# Altium PCB Amber_Main_Board.PcbDoc (part 4 of 6)
Units mm, origin at the board's own origin, x right, y up, seen from the top; angles counter-clockwise.
Board outline 90 x 23 mm, 4 copper layers (Top Layer, Power, Ground, Bottom Layer), stack 1.142 mm thick; 237 components, 104 nets, 614 pads, 347 vias.
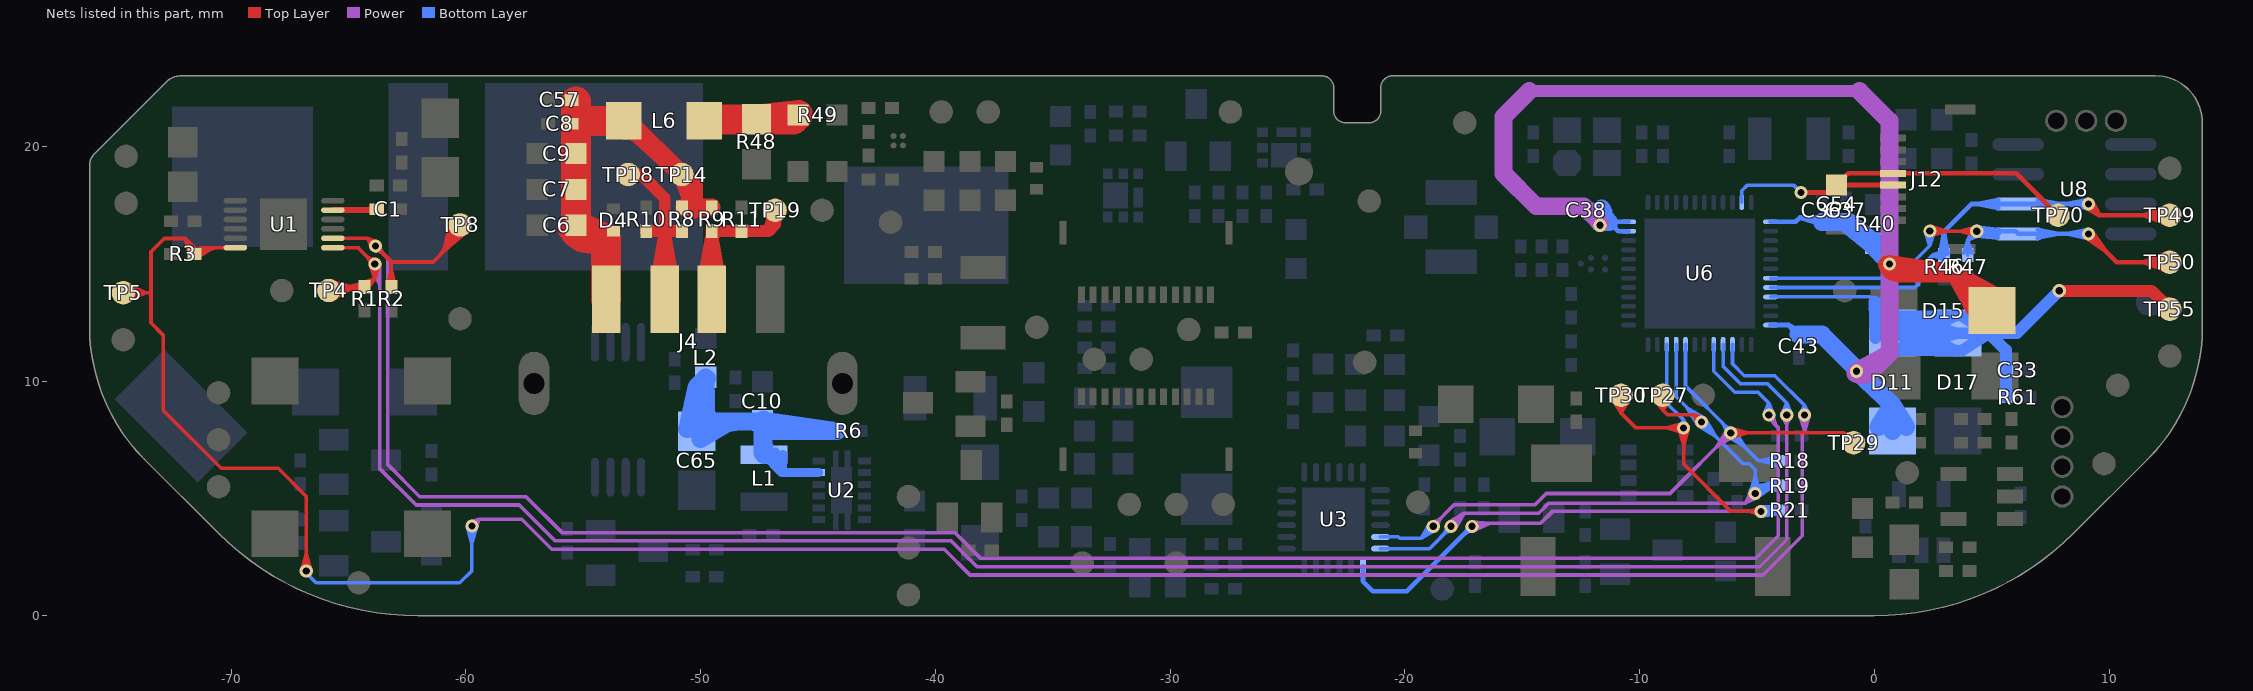
[diagram p6: the nets of this part, all layers, seen from the top]

## Via types
v1: diameter 0.559, hole 0.305, Top Layer to Bottom Layer, tented both sides, 306 vias
v2: diameter 0.66, hole 0.33, Top Layer to Bottom Layer, tented both sides, 16 vias
v3: diameter 0.762, hole 0.508, Top Layer to Bottom Layer, tented both sides, 12 vias
v4: diameter 0.6, hole 0.3, Top Layer to Bottom Layer, tented both sides, 9 vias
v5: diameter 0.5, hole 0.3, Top Layer to Bottom Layer, 3 vias
v6: diameter 0.762, hole 0.559, Top Layer to Bottom Layer, tented both sides, 1 vias

## Nets (pads, with @x,y where several pads share a name; then routed paths per layer and width w, separated by ;. In a path a pad name is that pad's centre, name@x,y a point inside that pad or via, vN(x,y) a via of type N, cw(c..) or ccw(c..) an arc to the next point about the centre after c; other vN are vias at no path point) (continued)
GPOUT: R3.1 TP5.1 U1.12 U6.15 | length 160.6
  Top Layer w0.152: TP5.1@-74.599,13.642 -73.845,13.726 ; TP5.1@-74.599,13.88 -73.845,13.796 ; TP5.1@-74.596,13.642 -73.646,13.761 ; TP5.1@-74.596,13.879 -73.646,13.761 ; TP5.1@-74.588,13.643 -73.845,13.796 ; TP5.1@-74.588,13.879 -73.845,13.726 ; TP5.1@-74.567,13.492 -73.845,13.726 ; TP5.1@-74.567,14.03 -73.845,13.796 ; TP5.1@-74.565,13.492 -73.646,13.761 ; TP5.1@-74.565,14.029 -73.646,13.761 ; TP5.1@-74.542,13.496 -73.845,13.796 ; TP5.1@-74.542,14.025 -73.845,13.726 ; TP5.1@-74.509,13.347 -73.646,13.761 ; TP5.1@-74.509,14.174 -73.646,13.761 ; TP5.1@-74.504,13.349 -73.845,13.726 ; TP5.1@-74.504,14.173 -73.845,13.796 ; TP5.1@-74.466,13.36 -73.845,13.796 ; TP5.1@-74.466,14.162 -73.845,13.726 ; TP5.1@-74.411,13.569 cw(c-73.948,13.106) -73.948,13.761 cw(c-73.948,14.416) TP5.1@-74.411,13.953 ; TP5.1@-74.303,13.461 cw(c-73.58,12.738) -73.58,13.761 cw(c-73.58,14.784) TP5.1@-74.303,14.06 ; -73.461,13.761 TP5.1@-74.603,13.761 ; R3.1@-71.783,15.45 -71.643,15.673 ; R3.1@-71.782,15.45 ccw(c-72.434,15.599) -71.961,16.072 ; R3.1@-71.782,15.371 -71.795,15.796 ; R3.1@-71.775,15.349 -71.961,16.072 ; -71.767,15.877 cw(c-72.117,15.527) R3.1@-71.634,15.416 ; R3.1@-71.631,15.572 ccw(c-71.674,15.674) -71.563,15.674 ; R3.1@-71.606,15.504 cw(c-71.177,15.076) -71.177,15.682 ; -71.572,15.682 cw(c-71.8,15.454) R3.1@-71.485,15.383 ; R3.1@-71.566,15.577 -71.062,15.649 ; R3.1@-71.552,15.581 -70.732,15.682 ; R3.1@-71.543,15.583 -70.856,15.616 ; R3.1@-71.513,15.586 ccw(c-71.513,15.884) -71.302,15.673 ; R3.1@-71.498,15.397 cw(c-70.81,14.708) -70.81,15.682 ; R3.1@-71.495,15.572 cw(c-71.452,15.674) -71.563,15.674 ; R3.1@-71.475,15.517 -71.795,15.796 ; R3.1@-71.47,15.51 -71.961,16.072 ; R3.1@-71.457,15.488 -71.643,15.673 ; R3.1@-71.441,15.254 -70.856,15.616 ; R3.1@-71.439,15.254 -70.732,15.682 ; R3.1@-71.407,15.274 -71.062,15.649 ; R3.1@-71.39,15.289 cw(c-70.442,14.34) -70.442,15.682 ; R3.1@-71.347,15.463 cw(c-71.139,15.528) -71.293,15.682 ; -70.777,15.682 U1.12@-70.2,15.682 ; U1.12@-69.82,15.682 -71.293,15.682 ; v1@-67.003,1.933 -66.802,2.642 v1@-66.601,1.933 ; v1@-67,1.953 -66.819,2.269 ; v1@-66.994,1.971 -66.785,2.269 ; v1@-66.946,2.049 ccw(c-67.293,2.396) -66.802,2.396 ccw(c-66.311,2.396) v1@-66.658,2.049 ; v1@-66.61,1.971 -66.819,2.269 ; v1@-66.604,1.953 -66.785,2.269 ; TP5.1@-74.603,13.761 -73.845,13.726 ; TP5.1@-74.603,13.761 -73.845,13.796 ; -71.961,16.072 R3.1@-71.613,15.412 ; -71.961,16.072 -72.848,16.072 -73.416,15.504 -73.416,12.475 -72.901,11.96 -72.901,8.76 -70.421,6.279 -68.001,6.279 -66.802,5.08 v1(-66.802,1.905) ; -71.961,16.072 -71.563,15.674 ; -71.795,15.796 R3.1@-71.613,15.412 ; -71.643,15.673 R3.1@-71.613,15.412 ; R3.1@-71.563,15.412 -71.563,15.674 ; R3.1@-71.563,15.412 -71.563,15.674 ; R3.1@-71.563,15.412 -71.293,15.682 ; -71.563,15.674 -71.727,15.469 -71.563,15.674 ; -71.563,15.674 -71.399,15.469 -71.563,15.674 ; R3.1@-71.513,15.412 -71.293,15.682 ; R3.1@-71.513,15.412 -70.856,15.616 ; R3.1@-71.513,15.412 -71.062,15.649 ; R3.1@-71.513,15.412 -70.732,15.682 ; R3.1@-71.513,15.412 -71.293,15.682 ; -71.293,15.682 -71.616,15.552 -71.293,15.682 ; -71.293,15.682 -71.355,15.339 -71.293,15.682 ; -66.819,2.269 v1(-66.802,1.905) ; v1(-66.802,1.905) -66.785,2.269
  Power w0.152: v1@-59.715,4.024 ccw(c-59.671,4.321) -59.458,4.109 ; v1@-59.543,3.852 cw(c-59.245,3.896) -59.458,4.109 ; v1@-3.176,8.523 -2.975,7.874 ; v1@-3.173,8.506 -2.992,8.19 ; v1@-3.167,8.488 -2.958,8.19 ; v1@-3.119,8.41 cw(c-3.466,8.063) -2.975,8.063 cw(c-2.484,8.063) v1@-2.831,8.41 ; v1@-2.783,8.488 -2.992,8.19 ; v1@-2.778,8.506 -2.958,8.19 ; v1@-2.774,8.523 -2.975,7.874 ; v1@-59.847,3.998 -59.458,4.109 ; v1@-59.847,3.998 -59.458,4.109 ; v1@-59.847,3.998 -59.458,4.109 ; v1(-59.744,3.823) -59.458,4.109 ; v1(-59.744,3.823) -59.458,4.109 ; v1(-59.744,3.823) -59.458,4.109 ; v1@-59.569,3.72 -59.458,4.109 ; v1@-59.569,3.72 -59.458,4.109 ; v1@-59.569,3.72 -59.458,4.109 ; -59.458,4.109 -57.617,4.109 -56.34,2.832 -39.624,2.832 -38.527,1.736 -4.741,1.736 -3.073,3.404 -3.073,7.776 -2.975,7.874 ; -2.992,8.19 v1(-2.975,8.554) ; -2.975,7.874 v1(-2.975,8.554) ; -2.975,7.874 v1(-2.975,8.554) ; v1(-2.975,8.554) -2.958,8.19
  Bottom Layer w0.152: v1(-66.802,1.905) -66.802,1.821 -66.384,1.404 -60.258,1.404 -59.744,1.918 v1(-59.744,3.823) ; v1@-59.945,3.795 -59.744,3.086 v1@-59.543,3.795 ; v1@-59.942,3.775 -59.761,3.459 ; v1@-59.936,3.757 -59.727,3.459 ; v1@-59.888,3.679 cw(c-60.235,3.332) -59.744,3.332 cw(c-59.253,3.332) v1@-59.6,3.679 ; v1@-59.552,3.757 -59.761,3.459 ; v1@-59.547,3.775 -59.727,3.459 ; -6.047,10.776 U6.15@-6.047,11.333 ; U6.15@-6.047,11.558 -6.047,10.732 -5.546,10.23 -4.245,10.23 -2.975,8.96 ; v1@-3.172,8.605 -2.975,8.96 ; v1@-3.171,8.609 -3,8.84 ; v1@-3.158,8.641 -2.951,8.84 ; v1@-3.097,8.716 ccw(c-3.28,8.96) -2.975,8.96 ; v1@-2.853,8.716 cw(c-2.67,8.96) -2.975,8.96 ; v1@-2.792,8.641 -3,8.84 ; v1@-2.78,8.609 -2.951,8.84 ; v1@-2.778,8.605 -2.975,8.96 ; -59.761,3.459 v1(-59.744,3.823) ; v1(-59.744,3.823) -59.727,3.459 ; -3,8.84 v1(-2.975,8.554) ; v1(-2.975,8.554) -2.951,8.84 ; v1(-2.975,8.554) -2.975,8.96
HALL_OUT: C54.1 J12.4 J12.5 TP70.1 U6.47 | length 17.7
  Top Layer w0.203: v1(-3.132,18.029) -1.926,18.029 C54.1@-1.608,18.346 C54.1@-1.606,18.348 ; J12.4@0.795,18.348 C54.1@-1.606,18.348 ; TP70.1@7.82,17.063 6.035,18.848 J12.5@0.795,18.848 -1.106,18.848 C54.1@-1.606,18.348
  Bottom Layer w0.152: U6.47@-5.647,17.608 -5.647,18.104 -5.405,18.346 -3.449,18.346 v1(-3.132,18.029)
I2C_A_SCL_T_E: R46.1 TP49.1 U6.8 U8.6 | length 58.3
  Top Layer w0.203: v1@9.004,17.398 9.588,17.063 ; v1@9.112,17.361 cw(c9.112,16.932) 9.416,17.235 cw(c9.719,17.539) v1@9.29,17.539 ; v1(9.112,17.539) 9.588,17.063 ; v1@9.253,17.647 9.588,17.063 ; TP49.1@12.302,16.781 ccw(c11.622,16.101) 11.622,17.063 ccw(c11.622,18.025) TP49.1@12.302,17.344 ; TP49.1@12.455,16.686 11.871,17.096 ; TP49.1@12.455,17.44 11.871,17.03 ; TP49.1@12.49,16.675 11.871,17.03 ; TP49.1@12.49,17.45 11.871,17.096 ; TP49.1@12.512,16.671 11.474,17.063 ; TP49.1@12.512,17.455 11.474,17.063 ; TP49.1@12.548,16.871 11.871,17.096 ; TP49.1@12.548,17.255 11.871,17.03 ; 9.588,17.063 TP49.1@12.584,17.063 ; 11.474,17.063 12.567,16.868 11.871,17.03 ; 11.474,17.063 12.567,17.257 11.871,17.096 ; 11.871,17.03 TP49.1@12.584,17.063 ; 11.871,17.096 TP49.1@12.584,17.063
  Bottom Layer w0.152: U6.8@-4.422,13.983 1.724,13.983 1.851,14.11 ; U6.8@-4.197,13.983 -3.64,13.983
  Bottom Layer w0.203: 1.851,14.11 1.851,14.714 2.499,15.362 ; R46.1@2.816,15.425 2.964,16.271 ; R46.1@2.82,15.447 2.952,15.677 ; R46.1@2.823,15.46 2.976,15.677 ; R46.1@2.859,15.257 ccw(c2.606,15.003) 2.606,15.362 ccw(c2.606,15.72) R46.1@2.859,15.467 ; R46.1@2.859,15.517 ccw(c2.606,15.77) 2.964,15.77 ccw(c3.322,15.77) R46.1@3.069,15.517 ; R46.1@2.916,15.221 2.698,15.374 ; R46.1@2.916,15.502 2.698,15.35 ; R46.1@2.929,15.217 2.698,15.35 ; R46.1@2.929,15.506 2.698,15.374 ; R46.1@2.94,15.215 2.499,15.362 ; R46.1@2.94,15.508 2.499,15.362 ; R46.1@3.104,15.46 2.952,15.677 ; R46.1@3.108,15.447 2.976,15.677 ; R46.1@3.112,15.425 2.964,16.271 ; U8.6@5.172,17.416 ccw(c4.876,17.12) 4.876,17.539 ccw(c4.876,17.957) U8.6@5.172,17.661 ; U8.6@5.239,17.375 4.985,17.553 ; U8.6@5.239,17.703 4.985,17.524 ; U8.6@5.254,17.37 4.985,17.524 ; U8.6@5.254,17.707 4.985,17.553 ; U8.6@5.278,17.366 4.41,17.539 ; U8.6@5.278,17.711 4.41,17.539 ; U8.6@6.962,17.366 7.83,17.539 ; U8.6@6.962,17.711 7.83,17.539 ; U8.6@6.986,17.37 7.255,17.524 ; U8.6@6.986,17.707 7.255,17.553 ; U8.6@7.001,17.375 7.255,17.553 ; U8.6@7.001,17.703 7.255,17.524 ; U8.6@7.068,17.416 cw(c7.364,17.12) 7.364,17.539 cw(c7.364,17.957) U8.6@7.068,17.661 ; v1@8.986,17.413 ccw(c8.683,17.109) 8.683,17.539 ccw(c8.683,17.968) v1@8.986,17.664 ; v1@9.055,17.37 8.794,17.553 ; v1@9.055,17.707 8.794,17.524 ; v1@9.07,17.366 8.794,17.524 ; v1@9.07,17.712 8.794,17.553 ; v1@9.094,17.362 8.223,17.539 v1@9.094,17.716 ; 2.499,15.362 R46.1@2.964,15.362 ; 2.499,15.362 R46.1@2.964,15.362 ; 2.698,15.35 R46.1@2.964,15.362 ; 2.698,15.374 R46.1@2.964,15.362 ; 2.952,15.677 R46.1@2.964,15.412 ; R46.1@2.964,15.362 2.964,16.378 4.125,17.539 U8.6@6.12,17.539 v1(9.112,17.539) ; R46.1@2.964,15.412 2.976,15.677 ; R46.1@2.964,15.412 2.964,16.271 ; 4.41,17.539 U8.6@5.295,17.539 ; 4.985,17.524 U8.6@5.295,17.539 ; 4.985,17.553 U8.6@5.295,17.539 ; U8.6@6.945,17.539 7.83,17.539 ; U8.6@6.945,17.539 7.255,17.524 ; U8.6@6.945,17.539 7.255,17.553 ; 8.794,17.524 v1(9.112,17.539) ; 8.794,17.553 v1(9.112,17.539)
I2C_A_SDA_T_E: R47.1 TP50.1 U6.7 U8.5 | length 87.8
  Top Layer w0.152: v1@2.202,16.378 v1(4.361,16.378) ; v1@2.382,16.194 3.096,16.378 ; v1@2.392,16.596 3.096,16.378 ; v1@2.401,16.197 2.695,16.363 ; v1@2.412,16.2 2.75,16.397 ; v1@2.411,16.592 2.75,16.397 ; v1@2.439,16.583 2.695,16.363 ; v1@2.503,16.252 cw(c2.806,15.949) 2.806,16.378 ; v1@2.503,16.539 ccw(c2.893,16.93) 2.893,16.378 ; v1@4.217,16.234 ccw(c3.87,15.887) 3.87,16.378 ccw(c3.87,16.868) v1@4.217,16.521 ; v1@4.295,16.185 3.997,16.394 ; v1@4.295,16.57 3.997,16.361 ; v1@4.313,16.18 3.997,16.361 ; v1@4.313,16.575 3.997,16.394 ; v1@4.333,16.176 3.624,16.378 v1@4.333,16.579 ; v1(2.359,16.396) 2.695,16.363 ; v1(2.359,16.396) 2.75,16.397 ; v1(2.359,16.396) 3.096,16.378 ; 3.997,16.361 v1(4.361,16.378) ; 3.997,16.394 v1(4.361,16.378)
  Top Layer w0.203: v1@8.998,16.132 9.822,15.558 v1@9.248,16.383 ; v1@9.112,16.091 cw(c9.112,15.662) 9.416,15.965 cw(c9.719,16.269) v1@9.29,16.269 ; v1(9.112,16.269) 10.318,15.063 TP50.1@12.584,15.063 ; TP50.1@12.302,14.781 ccw(c11.622,14.101) 11.622,15.063 ccw(c11.622,16.025) TP50.1@12.302,15.344 ; TP50.1@12.455,14.686 11.871,15.096 ; TP50.1@12.455,15.44 11.871,15.03 ; TP50.1@12.49,14.675 11.871,15.03 ; TP50.1@12.49,15.45 11.871,15.096 ; TP50.1@12.512,14.671 11.474,15.063 ; TP50.1@12.512,15.455 11.474,15.063 ; TP50.1@12.548,14.871 11.871,15.096 ; TP50.1@12.548,15.255 11.871,15.03 ; 11.474,15.063 12.567,14.868 11.871,15.03 ; 11.474,15.063 12.567,15.257 11.871,15.096 ; 11.871,15.03 TP50.1@12.584,15.063 ; 11.871,15.096 TP50.1@12.584,15.063
  Bottom Layer w0.152: U6.7@-4.422,14.383 0.981,14.383 2.359,15.761 ; U6.7@-4.197,14.383 -3.64,14.383 ; v1@2.158,16.363 2.359,15.761 ; v1@2.161,16.348 2.342,16.032 ; v1@2.167,16.33 2.376,16.032 ; v1@2.215,16.252 cw(c1.868,15.905) 2.359,15.905 cw(c2.85,15.905) v1@2.503,16.252 ; v1@2.551,16.33 2.342,16.032 ; v1@2.556,16.348 2.376,16.032 ; v1@2.56,16.363 2.359,15.761 ; R47.1@3.808,15.438 3.98,15.997 ; R47.1@3.811,15.453 3.966,15.723 ; R47.1@3.815,15.468 3.994,15.723 ; R47.1@3.857,15.535 ccw(c3.56,15.831) 3.98,15.831 ccw(c4.4,15.831) R47.1@4.103,15.535 ; R47.1@3.98,15.362 3.98,15.997 ; R47.1@4.144,15.468 3.966,15.723 ; R47.1@4.149,15.453 3.994,15.723 ; R47.1@4.152,15.438 3.98,15.997 ; v1@4.158,16.378 cw(c3.667,16.378) 4.014,16.031 cw(c4.361,15.684) v1@4.361,16.175 ; v1@4.193,16.492 3.98,15.997 ; v1@4.234,16.251 3.98,15.997 ; v1(4.361,16.378) 3.98,15.997 ; v1@4.475,16.21 3.98,15.997 ; 2.342,16.032 v1(2.359,16.396) ; 2.359,15.761 v1(2.359,16.396) ; 2.359,15.761 v1(2.359,16.396) ; v1(2.359,16.396) 2.376,16.032 ; 3.966,15.723 R47.1@3.98,15.412 ; R47.1@3.98,15.412 3.98,15.997 ; R47.1@3.98,15.412 3.994,15.723
  Bottom Layer w0.203: v1@4.234,16.251 v1(4.361,16.378) ; v1@4.325,16.204 U8.5@5.223,16.111 ; v1@4.356,16.2 5.009,16.272 ; v1@4.358,16.2 U8.5@5.246,16.275 ; v1@4.367,16.555 U8.5@5.249,16.438 ; v1@4.376,16.201 4.726,16.319 ; v1@4.379,16.201 5.25,16.378 v1@4.379,16.555 ; v1@4.391,16.202 U8.5@5.249,16.438 ; v1@4.399,16.551 U8.5@5.246,16.275 ; v1@4.403,16.205 4.679,16.363 ; v1@4.403,16.551 4.679,16.392 ; v1@4.413,16.548 5.009,16.272 ; v1@4.418,16.209 4.679,16.392 ; v1@4.418,16.546 4.679,16.363 ; v1@4.43,16.542 U8.5@5.223,16.111 ; v1@4.431,16.541 4.726,16.319 ; v1@4.459,16.229 cw(c4.759,15.776) 4.899,16.301 ; v1@4.487,16.252 cw(c4.79,15.948) 4.79,16.378 cw(c4.79,16.807) v1@4.487,16.503 ; v1@4.613,16.378 cw(c4.613,15.587) U8.5@5.172,16.146 ; U8.5@5.235,16.106 4.818,16.351 ; U8.5@5.257,16.1 v1@4.41,16.378 ; U8.5@5.293,16.442 4.818,16.351 ; U8.5@5.299,16.442 v1@4.41,16.378 ; U8.5@6.962,16.096 7.83,16.269 ; U8.5@6.962,16.441 7.83,16.269 ; U8.5@6.986,16.1 7.255,16.254 ; U8.5@6.986,16.437 7.255,16.283 ; U8.5@7.001,16.105 7.255,16.283 ; U8.5@7.001,16.433 7.255,16.254 ; U8.5@7.068,16.146 cw(c7.364,15.85) 7.364,16.269 cw(c7.364,16.687) U8.5@7.068,16.391 ; v1@8.986,16.143 ccw(c8.683,15.839) 8.683,16.269 ccw(c8.683,16.698) v1@8.986,16.394 ; v1@9.055,16.1 8.794,16.283 ; v1@9.055,16.437 8.794,16.254 ; v1@9.07,16.096 8.794,16.254 ; v1@9.07,16.442 8.794,16.283 ; v1@9.094,16.092 8.223,16.269 v1@9.094,16.446 ; v1(4.361,16.378) U8.5@5.249,16.438 ; v1(4.361,16.378) U8.5@5.246,16.275 ; v1(4.361,16.378) 5.009,16.272 ; v1(4.361,16.378) U8.5@5.223,16.111 ; v1(4.361,16.378) 4.679,16.363 ; v1(4.361,16.378) 4.679,16.392 ; v1(4.361,16.378) 4.726,16.319 ; v1(4.361,16.378) 6.011,16.378 U8.5@6.12,16.269 v1(9.112,16.269) ; v1@4.41,16.378 5.295,16.269 4.818,16.351 ; U8.5@6.945,16.269 7.83,16.269 ; U8.5@6.945,16.269 7.255,16.283 ; U8.5@6.945,16.269 7.255,16.254 ; 8.794,16.254 v1(9.112,16.269) ; 8.794,16.283 v1(9.112,16.269)
I_2.06V: J4.2 R8.2 R10.1 TP18.1 | length 21.4
  Top Layer w0.508: TP18.1@-52.903,18.631 cw(c-52.532,18.296) -52.532,18.796 ; TP18.1@-52.903,18.961 ccw(c-52.532,19.296) -52.532,18.796 ; R10.1@-52.324,16.391 -51.53,16.391 ; J4.2@-51.885,14.337 -51.53,16.391 ; J4.2@-51.876,14.391 -51.559,14.944 ; J4.2@-51.867,14.422 -51.501,14.944 ; J4.2@-51.782,14.559 ccw(c-52.39,15.166) -51.53,15.166 ccw(c-50.671,15.166) J4.2@-51.278,14.559 ; J4.2@-51.562,13.509 J4.2@-51.53,13.477 -51.53,16.391 ; J4.2@-51.193,14.422 -51.559,14.944 ; J4.2@-51.184,14.391 -51.501,14.944 ; J4.2@-51.175,14.337 -51.53,16.391 ; -52.532,18.796 TP18.1@-53.086,18.796 -52.532,18.796 ; -52.532,18.796 -51.53,17.794 -51.53,16.391 ; -51.559,14.944 J4.2@-51.53,14.307 ; J4.2@-51.53,14.307 -51.501,14.944 ; J4.2@-51.53,14.307 -51.53,16.391 ; -51.53,16.391 R8.2@-50.8,16.391 -51.53,16.391
I_2.76V: J4.3 R9.2 R11.1 TP19.1 | length 33.7
  Top Layer w0.508: J4.3@-49.884,14.342 R9.2@-49.53,16.137 ; J4.3@-49.876,14.391 -49.559,14.944 ; J4.3@-49.867,14.422 -49.501,14.944 ; J4.3@-49.839,14.574 R9.2@-49.53,16.341 ; J4.3@-49.782,14.559 ccw(c-50.39,15.166) -49.53,15.166 ccw(c-48.671,15.166) J4.3@-49.278,14.559 ; J4.3@-49.53,13.477 R9.2@-49.53,16.137 ; J4.3@-49.222,14.574 R9.2@-49.53,16.341 ; J4.3@-49.193,14.422 -49.559,14.944 ; J4.3@-49.184,14.391 -49.501,14.944 ; J4.3@-49.176,14.342 R9.2@-49.53,16.137 ; TP19.1@-47.036,17.135 cw(c-47.526,16.808) -47.109,16.391 ; TP19.1@-47.005,17.098 cw(c-47.425,16.678) -46.831,16.678 cw(c-46.237,16.678) TP19.1@-46.657,17.098 ; -49.559,14.944 J4.3@-49.53,14.307 ; J4.3@-49.53,14.307 -49.501,14.944 ; J4.3@-49.53,14.307 R9.2@-49.53,16.137 ; R9.2@-49.53,16.137 -49.276,16.391 ; R9.2@-49.53,16.341 -49.53,14.567 R9.2@-49.53,16.341 ; R9.2@-49.53,16.391 R11.1@-48.387,16.391 ; R9.2@-49.53,16.391 R11.1@-48.26,16.391 ; R9.2@-49.53,16.391 -49.276,16.391 ; R9.2@-49.53,16.391 -49.276,16.391 ; R9.2@-49.53,16.391 -49.276,16.391 ; R9.2@-49.53,16.391 -49.276,16.391 ; R9.2@-49.53,16.391 -49.276,16.391 ; -49.276,16.391 R11.1@-48.26,16.391 ; -49.276,16.391 R11.1@-48.387,16.391 ; R11.1@-48.387,16.391 -47.109,16.391 ; R11.1@-48.26,16.391 -47.109,16.391 ; -47.109,16.391 TP19.1@-46.831,17.272 ; -47.109,16.391 -46.831,16.669 ; -46.831,16.669 TP19.1@-46.831,17.272 ; -46.831,16.669 TP19.1@-46.831,17.272 ; -46.831,16.669 TP19.1@-46.831,17.272
IIC_A_M_BAT_SCL: R18.2 TP29.1 U3.5 U6.20 | length 50.4
  Top Layer w0.152: v1@-6.094,7.59 -5.385,7.792 v1@-6.094,7.993 ; v1@-6.074,7.594 -5.758,7.775 ; v1@-6.074,7.989 -5.758,7.808 ; v1@-6.056,7.599 -5.758,7.808 ; v1@-6.056,7.984 -5.758,7.775 ; v1@-5.978,7.648 cw(c-5.631,7.301) -5.631,7.792 cw(c-5.631,8.282) v1@-5.978,7.935 ; TP29.1@-1.272,7.547 ccw(c-1.467,7.639) -1.315,7.792 ; TP29.1@-1.07,7.749 cw(c-1.162,7.944) -1.315,7.792 ; TP29.1@-1.016,7.239 TP29.1@-0.889,7.366 -1.315,7.792 ; v1(-6.122,7.792) -5.758,7.775 ; v1(-6.122,7.792) -5.758,7.808 ; v1(-6.122,7.792) -1.315,7.792
  Power w0.152: v1(-18.796,3.81) -18.796,3.838 -17.91,4.724 -14.458,4.724 -13.975,5.207 -8.707,5.207 v1(-6.122,7.792) -6.724,7.189 ; v1@-18.796,4.013 ccw(c-18.796,4.436) -18.497,4.137 ; v1@-18.593,3.81 cw(c-18.034,3.81) -18.429,4.205 ; v1@-6.325,7.792 cw(c-6.816,7.792) -6.469,7.445 cw(c-6.122,7.098) v1@-6.122,7.589 ; v1@-6.282,7.917 -6.724,7.189 ; v1@-5.996,7.632 -6.724,7.189
  Bottom Layer w0.152: U3.5@-21.041,3.359 -20.288,3.359 ; U3.5@-20.766,3.359 -20.288,3.359 ; v1@-18.999,3.81 cw(c-19.49,3.81) -19.143,3.463 cw(c-18.796,3.116) v1@-18.796,3.607 ; v1@-18.958,3.932 -19.31,3.296 ; v1@-18.674,3.648 -19.31,3.296 ; -8.047,10.776 U6.20@-8.047,11.333 ; U6.20@-8.047,11.558 -8.047,9.787 -6.122,7.862 v1(-6.122,7.792) -4.936,6.606 R18.2@-4.11,6.606 ; -6.519,8.259 cw(c-6.986,7.792) v1@-6.325,7.792 ; -6.348,8.089 ccw(c-6.122,8.315) v1@-6.122,7.995 ; v1@-6.247,7.632 -5.519,7.189 v1@-5.962,7.917 ; v1@-6.122,7.589 cw(c-6.122,7.098) -5.775,7.445 cw(c-5.428,7.792) v1@-5.919,7.792 ; R18.2@-4.283,6.483 ccw(c-4.58,6.187) -4.58,6.606 ccw(c-4.58,7.026) R18.2@-4.283,6.729 ; R18.2@-4.216,6.442 -4.471,6.621 ; R18.2@-4.216,6.771 -4.471,6.592 ; R18.2@-4.201,6.437 -4.471,6.592 ; R18.2@-4.201,6.775 -4.471,6.621 ; R18.2@-4.181,6.434 -4.867,6.606 ; R18.2@-4.181,6.779 -4.867,6.606 ; -20.288,3.359 -20.225,3.296 -19.31,3.296 ; -19.31,3.296 v1(-18.796,3.81) -19.31,3.296 ; -4.867,6.606 R18.2@-4.16,6.606 ; -4.471,6.592 R18.2@-4.16,6.606 ; -4.471,6.621 R18.2@-4.16,6.606
IIC_A_M_BAT_SDA: R19.2 TP27.1 U3.6 U6.21 | length 72.6
  Top Layer w0.152: TP27.1@-9.417,9.257 -9.017,8.763 ; TP27.1@-9.282,9.34 -9.017,8.763 ; TP27.1@-9.18,9.007 cw(c-9.281,8.763) -9.017,8.763 ; TP27.1@-9.135,9.387 -9.017,8.763 ; TP27.1@-9.017,9.398 -9.017,8.763 ; TP27.1@-8.899,9.387 -9.017,8.763 ; TP27.1@-8.854,9.007 ccw(c-8.753,8.763) -9.017,8.763 ; TP27.1@-8.752,9.34 -9.017,8.763 ; TP27.1@-8.617,9.257 -9.017,8.763 ; v1@-7.568,8.274 ccw(c-7.922,8.308) -7.671,8.56 ; v1@-7.54,8.149 -7.671,8.56 ; v1@-7.385,8.457 cw(c-7.419,8.811) -7.671,8.56 ; v1@-7.26,8.429 -7.671,8.56 ; -9.017,8.763 -8.814,8.56 -7.671,8.56 ; -7.671,8.56 v1(-7.366,8.255) -7.671,8.56
  Power w0.152: v1@-18.158,3.971 -17.475,4.369 ; v1(-18.034,3.81) -17.475,4.369 ; v1@-18.034,4.013 ccw(c-18.034,4.504) -17.687,4.157 ccw(c-17.34,3.81) v1@-17.831,3.81 ; v1@-17.873,3.686 -17.475,4.369 ; v1@-5.334,5.207 v1(-5.08,5.207) ; v1@-5.283,5.207 cw(c-5.774,5.207) -5.427,4.86 cw(c-5.08,4.513) v1@-5.08,5.004 ; v1@-5.247,5.323 -5.486,4.801 ; v1@-4.964,5.04 -5.486,4.801 ; -17.475,4.369 -14.3,4.369 -13.868,4.801 -5.486,4.801 ; -5.486,4.801 v1(-5.08,5.207) ; -5.486,4.801 v1(-5.08,5.207)
  Bottom Layer w0.152: U3.6@-21.041,2.859 -18.957,2.859 -18.034,3.782 v1(-18.034,3.81) ; U3.6@-20.766,2.859 -20.184,2.859 ; -18.401,3.415 ccw(c-18.796,3.81) v1@-18.237,3.81 ; -18.333,3.483 cw(c-18.034,3.184) v1@-18.034,3.607 ; -8.447,10.776 U6.21@-8.447,11.333 ; U6.21@-8.447,11.558 -8.447,9.327 -5.597,6.477 -5.334,6.477 -5.08,6.223 v1(-5.08,5.207) ; -7.729,8.608 ccw(c-7.366,8.971) v1@-7.366,8.458 ; -7.706,8.586 cw(c-8.037,8.255) v1@-7.569,8.255 ; v1@-7.525,8.128 -7.972,8.852 ; v1@-7.493,8.096 -6.769,7.648 ; v1@-7.366,8.052 cw(c-7.366,7.584) -7.035,7.915 ; v1@-7.242,8.416 -7.972,8.852 ; v1@-7.205,8.379 -6.769,7.648 ; v1@-7.163,8.255 ccw(c-6.65,8.255) -7.013,7.892 ; v1@-5.297,5.339 cw(c-4.925,5.112) -4.925,5.548 ; v1@-5.281,5.235 -5.08,5.944 v1@-4.879,5.235 ; v1@-5.28,5.242 -5.133,5.495 ; v1@-5.278,5.255 -5.097,5.571 ; v1@-5.272,5.273 -5.063,5.571 ; v1@-5.224,5.351 ccw(c-5.571,5.698) -5.08,5.698 ccw(c-4.589,5.698) v1@-4.936,5.351 ; v1@-5.167,5.26 cw(c-4.653,4.947) -4.653,5.548 ; v1@-5.158,5.395 -4.749,5.454 ; v1@-5.146,5.399 ccw(c-5.198,5.548) -5.04,5.548 ; v1@-5.136,5.402 R19.2@-4.253,5.548 ; v1@-5.126,5.405 -4.557,5.434 ; v1@-5.04,5.247 -5.04,5.548 ; v1@-5.037,5.181 cw(c-4.382,4.781) R19.2@-4.382,5.548 ; v1@-4.982,5.029 R19.2@-4.253,5.548 ; v1@-4.967,5.038 -4.557,5.434 ; v1@-4.953,5.365 cw(c-4.805,5.548) -5.04,5.548 ; v1@-4.922,5.079 -4.749,5.454 ; v1@-4.907,5.101 cw(c-4.11,4.615) R19.2@-4.11,5.548 -5.04,5.548 ; v1@-4.905,5.311 -5.133,5.495 ; v1@-4.888,5.273 -5.097,5.571 ; v1@-4.882,5.255 -5.063,5.571 ; R19.2@-4.283,5.425 ccw(c-4.58,5.128) -4.58,5.548 ccw(c-4.58,5.968) R19.2@-4.283,5.671 ; R19.2@-4.242,5.701 -4.577,5.423 ; R19.2@-4.216,5.384 -4.471,5.562 ; R19.2@-4.216,5.713 -4.471,5.534 ; R19.2@-4.213,5.714 -4.765,5.445 ; R19.2@-4.201,5.379 -4.471,5.534 ; R19.2@-4.201,5.717 -4.471,5.562 ; R19.2@-4.181,5.376 -4.867,5.548 ; R19.2@-4.181,5.721 -4.867,5.548 ; R19.2@-4.155,5.374 -4.765,5.445 ; R19.2@-4.144,5.375 -4.577,5.423 ; -7.972,8.852 v1(-7.366,8.255) -6.769,7.648 ; -5.133,5.495 v1(-5.08,5.207) ; -5.097,5.571 v1(-5.08,5.207) ; v1(-5.08,5.207) R19.2@-4.253,5.548 ; v1(-5.08,5.207) -4.557,5.434 ; v1(-5.08,5.207) -5.04,5.548 ; v1(-5.08,5.207) -5.04,5.548 ; v1(-5.08,5.207) -4.749,5.454 ; v1(-5.08,5.207) -5.063,5.571 ; -5.04,5.548 -5.266,5.289 -5.04,5.548 ; -5.04,5.548 -4.88,5.244 -5.04,5.548 ; -4.867,5.548 R19.2@-4.16,5.548 ; -4.765,5.445 R19.2@-4.16,5.548 ; -4.577,5.423 R19.2@-4.16,5.548 ; -4.471,5.534 R19.2@-4.16,5.548 ; -4.471,5.562 R19.2@-4.16,5.548
IIC_A_SCL_BAT: R2.1 TP8.1 U1.2 U6.17 | length 139.8
  Top Layer w0.152: U1.2@-65.67,16.082 -64.186,16.082 ; U1.2@-65.29,16.082 -64.713,16.082 ; v1@-64.056,15.754 ccw(c-64.502,15.766) -64.186,16.082 ; v1@-64.024,15.639 -64.186,16.082 ; v1@-63.858,15.951 cw(c-63.871,16.397) -64.186,16.082 ; v1@-63.853,15.545 cw(c-63.853,15.054) -63.506,15.401 cw(c-63.159,15.748) v1@-63.65,15.748 ; v1@-63.743,15.919 -64.186,16.082 ; R2.1@-63.346,14.078 -63.173,14.764 ; R2.1@-63.342,14.098 -63.187,14.368 ; R2.1@-63.338,14.113 -63.159,14.368 ; R2.1@-63.296,14.18 ccw(c-63.593,14.476) -63.173,14.476 ccw(c-62.753,14.476) R2.1@-63.05,14.18 ; R2.1@-63.173,14.007 -63.173,15.068 ; R2.1@-63.009,14.113 -63.187,14.368 ; R2.1@-63.004,14.098 -63.159,14.368 ; R2.1@-63.001,14.078 -63.173,14.764 ; -61.292,15.162 ccw(c-62.78,16.65) TP8.1@-60.676,16.65 ; -61.032,15.422 ccw(c-62.26,16.65) TP8.1@-60.523,16.65 ; -60.772,15.682 ccw(c-61.739,16.65) TP8.1@-60.371,16.65 ; TP8.1@-60.672,16.704 -60.554,15.966 ; TP8.1@-60.665,16.553 -60.353,16.15 ; TP8.1@-60.655,16.78 -60.756,15.782 ; TP8.1@-60.653,16.788 -60.831,15.623 ; TP8.1@-60.64,16.82 -60.895,15.714 ; TP8.1@-60.523,16.631 -60.353,16.15 ; TP8.1@-60.516,16.713 -60.554,15.966 ; -60.512,15.942 ccw(c-61.219,16.65) TP8.1@-60.219,16.65 ; TP8.1@-60.503,16.753 -60.756,15.782 ; TP8.1@-60.502,16.755 -60.831,15.623 ; TP8.1@-60.492,16.776 -60.895,15.714 ; TP8.1@-60.371,16.659 -60.353,16.15 ; TP8.1@-60.364,16.689 -60.554,15.966 ; TP8.1@-60.354,16.712 -60.895,15.714 ; TP8.1@-60.158,16.577 -60.895,15.714 ; TP8.1@-60.153,16.584 -60.756,15.782 ; TP8.1@-60.151,16.586 -60.831,15.623 ; TP8.1@-60.147,16.593 -60.554,15.966 ; TP8.1@-60.139,16.613 -60.353,16.15 ; TP8.1@-60.048,16.47 -60.895,15.714 ; TP8.1@-60.038,16.483 -60.756,15.782 ; TP8.1@-60.033,16.49 -60.831,15.623 ; TP8.1@-60.028,16.497 -60.554,15.966 ; TP8.1@-60.01,16.527 -60.353,16.15 ; TP8.1@-59.954,16.349 -60.895,15.714 ; TP8.1@-59.939,16.364 -60.756,15.782 ; TP8.1@-59.929,16.376 -60.554,15.966 ; TP8.1@-59.926,16.379 -60.831,15.623 ; TP8.1@-59.909,16.401 -60.353,16.15 ; -64.186,16.082 v1(-63.853,15.748) ; -64.186,16.082 v1(-63.853,15.748) ; v1(-63.853,15.748) -63.173,15.068 ; -63.187,14.368 R2.1@-63.173,14.057 ; R2.1@-63.173,14.057 -63.159,14.368 ; R2.1@-63.173,14.057 -63.173,14.764 ; -63.173,15.068 -61.386,15.068 -60.252,16.202 TP8.1@-60.252,16.65 ; -60.895,15.714 TP8.1@-60.252,16.65 ; -60.831,15.623 -60.359,16.703 -60.756,15.782 ; -60.831,15.623 TP8.1@-60.252,16.65 ; -60.756,15.782 TP8.1@-60.252,16.65 ; -60.554,15.966 TP8.1@-60.252,16.65 ; -60.353,16.15 TP8.1@-60.252,16.65
  Power w0.152: v1@-63.853,15.545 cw(c-63.853,15.054) -63.506,15.401 cw(c-63.159,15.748) v1@-63.65,15.748 ; v1(-63.853,15.748) -63.322,15.217 -63.322,6.426 -61.97,5.074 -57.439,5.074 -55.909,3.543 -39.176,3.543 -38.08,2.447 -5.046,2.447 -4.093,3.4 -4.093,8.001 ; v1(-4.499,8.554) -4.499,8.407 -4.093,8.001 ; v1@-4.448,8.55 ccw(c-4.046,8.525) -4.331,8.239 ; v1@-4.296,8.541 ccw(c-3.598,8.496) -4.093,8.001
  Bottom Layer w0.152: -6.847,10.776 U6.17@-6.847,11.333 ; U6.17@-6.847,11.558 -6.847,10.412 -5.954,9.519 -4.956,9.519 -4.499,9.062 ; v1@-4.698,8.594 -4.499,9.062 ; v1@-4.697,8.601 -4.516,8.917 ; v1@-4.691,8.619 -4.482,8.917 ; v1@-4.643,8.697 ccw(c-4.99,9.044) -4.499,9.044 ccw(c-4.008,9.044) v1@-4.355,8.697 ; v1@-4.307,8.619 -4.516,8.917 ; v1@-4.302,8.601 -4.482,8.917 ; v1@-4.3,8.594 -4.499,9.062 ; -4.516,8.917 v1(-4.499,8.554) ; v1(-4.499,8.554) -4.482,8.917 ; v1(-4.499,8.554) -4.499,9.062
IIC_A_SDA_BAT: R1.1 TP4.1 U1.1 U6.16 | length 143.3
  Top Layer w0.152: TP4.1@-65.864,13.972 -65.313,14.024 ; TP4.1@-65.857,14.127 -65.313,14.024 ; TP4.1@-65.851,13.974 -64.868,14.007 ; TP4.1@-65.849,13.974 -65.123,13.967 ; TP4.1@-65.844,14.127 -64.868,14.007 ; TP4.1@-65.842,13.975 -64.927,13.932 ; TP4.1@-65.831,14.127 -65.123,13.967 ; TP4.1@-65.823,13.738 -64.927,13.932 ; TP4.1@-65.822,14.127 -64.927,13.932 ; TP4.1@-65.815,13.739 -64.868,14.007 ; TP4.1@-65.813,14.279 -64.868,14.007 ; TP4.1@-65.812,13.74 -65.123,13.967 ; TP4.1@-65.805,14.278 -65.313,14.024 ; TP4.1@-65.792,13.747 -65.313,14.024 ; TP4.1@-65.78,14.275 -65.123,13.967 ; TP4.1@-65.778,13.592 -64.927,13.932 ; TP4.1@-65.777,14.275 -64.927,13.932 ; TP4.1@-65.762,13.596 -64.868,14.007 ; TP4.1@-65.756,13.772 cw(c-65.188,13.204) -65.188,14.007 ; TP4.1@-65.749,13.6 -65.123,13.967 ; TP4.1@-65.708,13.453 -64.927,13.932 ; TP4.1@-65.697,13.625 -65.313,14.024 ; TP4.1@-65.686,13.461 -64.868,14.007 ; U1.1@-65.67,15.682 -64.577,15.682 ; TP4.1@-65.656,13.474 -65.123,13.967 ; TP4.1@-65.648,13.664 cw(c-64.82,12.836) -64.82,14.007 ; TP4.1@-65.566,13.532 -65.313,14.024 ; TP4.1@-65.54,13.556 cw(c-64.452,12.468) R1.1@-64.452,14.007 ; TP4.1@-65.54,14.155 ccw(c-65.181,14.514) -65.181,14.007 ; U1.1@-65.278,15.672 -64.596,15.672 v1@-63.909,14.986 ; -64.713,15.672 -65.29,15.682 -64.713,15.682 ; R1.1@-64.439,13.884 ccw(c-64.736,13.587) -64.736,14.007 ccw(c-64.736,14.426) R1.1@-64.439,14.13 ; R1.1@-64.388,14.215 -63.881,14.351 ; R1.1@-64.375,14.22 -64.051,14.244 ; R1.1@-64.372,13.842 -64.627,14.021 ; R1.1@-64.372,14.171 -64.627,13.992 ; R1.1@-64.357,13.838 -64.627,13.992 ; R1.1@-64.357,14.176 -64.627,14.021 ; R1.1@-64.351,14.127 -65.013,13.901 ; R1.1@-64.337,13.834 -65.023,14.007 R1.1@-64.337,14.179 ; R1.1@-64.324,13.783 -65.013,13.901 ; R1.1@-64.316,13.957 -65.013,13.901 ; R1.1@-64.283,14.227 ccw(c-64.199,14.669) -63.881,14.351 ; -64.276,15.353 ccw(c-63.881,15.748) v1@-63.881,15.189 ; -64.208,15.285 cw(c-64.507,14.986) v1@-64.084,14.986 ; R1.1@-64.196,13.931 -63.881,14.351 ; R1.1@-64.181,13.947 -64.051,14.244 ; v1@-64.082,14.953 -63.881,14.351 ; v1@-64.079,14.938 -63.898,14.622 ; v1@-64.073,14.92 -63.864,14.622 ; v1@-64.025,14.842 cw(c-64.372,14.495) -63.881,14.495 cw(c-63.39,14.495) v1@-63.737,14.842 ; v1@-63.689,14.92 -63.898,14.622 ; v1@-63.683,14.938 -63.864,14.622 ; v1@-63.68,14.953 -63.881,14.351 ; TP4.1@-65.84,13.856 -64.927,13.932 ; TP4.1@-65.84,13.856 -65.123,13.967 ; TP4.1@-65.84,13.856 -64.868,14.007 ; TP4.1@-65.84,13.856 -65.313,14.024 ; TP4.1@-65.84,13.856 -65.689,14.007 R1.1@-64.316,14.007 ; -64.627,13.992 R1.1@-64.316,14.007 ; -64.627,14.021 R1.1@-64.316,14.007 ; R1.1@-64.316,14.007 -64.225,14.007 -63.881,14.351 ; -64.051,14.244 -64.316,14.057 -63.881,14.351 ; v1@-63.909,14.986 -63.881,14.958 -63.881,14.351 ; v1@-63.909,14.986 v1(-63.881,14.986) ; -63.898,14.622 v1(-63.881,14.986) ; -63.881,14.351 v1(-63.881,14.986) ; v1(-63.881,14.986) -63.864,14.622
  Power w0.152: v1@-64.072,14.918 -63.678,14.115 ; v1@-64.069,14.91 -63.718,14.311 ; v1@-64.043,14.864 -63.706,14.584 ; v1@-64.025,14.842 cw(c-64.862,14.005) -63.678,14.005 ; v1@-63.917,14.95 cw(c-64.494,14.373) -63.678,14.373 ; v1@-63.809,15.058 cw(c-64.126,14.741) -63.678,14.741 ; v1@-63.681,15.022 -63.706,14.584 ; v1@-63.679,15.004 -63.718,14.311 ; v1@-63.679,15.009 -63.678,14.115 ; v1@-3.935,8.506 -3.754,8.19 ; v1@-3.929,8.488 -3.72,8.19 ; v1@-3.881,8.41 cw(c-4.228,8.063) -3.737,8.063 cw(c-3.246,8.063) v1@-3.593,8.41 ; v1@-3.545,8.488 -3.754,8.19 ; v1@-3.54,8.506 -3.72,8.19 ; v1(-63.881,14.986) -63.706,14.584 ; v1(-63.881,14.986) -63.718,14.311 ; v1(-63.881,14.986) -63.678,14.115 ; v1(-63.881,14.986) -63.678,14.783 -63.678,6.274 -62.122,4.718 -57.724,4.718 -56.193,3.188 -39.324,3.188 -38.227,2.091 -4.889,2.091 -3.737,3.243 v1(-3.737,8.554) ; -3.754,8.19 v1(-3.737,8.554) ; v1(-3.737,8.554) -3.72,8.19
  Bottom Layer w0.152: -6.447,10.776 U6.16@-6.447,11.333 ; U6.16@-6.447,11.558 -6.447,10.629 -5.693,9.875 -4.55,9.875 -3.737,9.062 ; v1@-3.936,8.594 -3.737,9.062 ; v1@-3.935,8.601 -3.754,8.917 ; v1@-3.929,8.619 -3.72,8.917 ; v1@-3.881,8.697 ccw(c-4.228,9.044) -3.737,9.044 ccw(c-3.246,9.044) v1@-3.593,8.697 ; v1@-3.545,8.619 -3.754,8.917 ; v1@-3.54,8.601 -3.72,8.917 ; v1@-3.538,8.594 -3.737,9.062 ; -3.754,8.917 v1(-3.737,8.554) ; v1(-3.737,8.554) -3.72,8.917 ; v1(-3.737,8.554) -3.737,9.062
INT_CHG: R21.2 TP30.1 U3.7 U6.22 | length 113.2
  Top Layer w0.152: TP30.1@-11.202,9.28 -10.795,8.636 ; TP30.1@-11.2,9.273 -10.851,8.859 ; TP30.1@-11.166,9.193 -10.739,8.859 ; TP30.1@-11.063,9.358 -10.851,8.859 ; TP30.1@-11.062,9.35 -10.795,8.636 ; TP30.1@-11.049,9.303 -10.739,8.859 ; TP30.1@-11.019,9.038 cw(c-11.268,8.636) -10.795,8.636 ; TP30.1@-10.914,9.397 -10.851,8.859 ; TP30.1@-10.914,9.389 -10.795,8.636 ; TP30.1@-10.911,9.373 -10.739,8.859 ; TP30.1@-10.679,9.373 -10.851,8.859 ; TP30.1@-10.676,9.389 -10.795,8.636 ; TP30.1@-10.676,9.397 -10.739,8.859 ; TP30.1@-10.571,9.038 ccw(c-10.322,8.636) -10.795,8.636 ; TP30.1@-10.541,9.303 -10.851,8.859 ; TP30.1@-10.528,9.35 -10.795,8.636 ; TP30.1@-10.527,9.358 -10.739,8.859 ; TP30.1@-10.424,9.193 -10.851,8.859 ; TP30.1@-10.39,9.273 -10.739,8.859 ; TP30.1@-10.388,9.28 -10.795,8.636 ; v1@-8.329,7.973 -8.128,7.264 v1@-7.927,7.973 ; v1@-8.326,7.953 -8.145,7.637 ; v1@-8.32,7.935 -8.111,7.637 ; v1@-8.272,8.145 cw(c-8.619,8.492) -8.619,8.001 cw(c-8.619,7.51) -8.272,7.857 cw(c-8.619,7.51) -8.128,7.51 cw(c-7.637,7.51) v1@-7.984,7.857 ; v1@-8.194,7.809 -8.492,8.018 ; v1@-8.194,8.193 -8.492,7.984 ; v1@-8.176,7.803 -8.492,7.984 ; v1@-8.176,8.199 -8.492,8.018 ; v1@-8.156,7.8 -8.865,8.001 v1@-8.156,8.202 ; v1@-7.936,7.935 -8.145,7.637 ; v1@-7.93,7.953 -8.111,7.637 ; v1@-4.97,4.301 ccw(c-5.317,3.954) -5.317,4.445 ccw(c-5.317,4.936) v1@-4.97,4.589 ; v1@-4.892,4.253 -5.19,4.462 ; v1@-4.892,4.637 -5.19,4.428 ; v1@-4.874,4.247 -5.19,4.428 ; v1@-4.874,4.643 -5.19,4.462 ; -10.851,8.859 TP30.1@-10.795,9.398 ; -10.795,8.636 -10.16,8.001 v1(-8.128,8.001) ; -10.795,8.636 TP30.1@-10.795,9.398 ; TP30.1@-10.795,9.398 -10.739,8.859 ; -8.492,7.984 v1(-8.128,8.001) ; -8.492,8.018 v1(-8.128,8.001) ; -8.145,7.637 v1(-8.128,8.001) ; v1(-8.128,8.001) -8.111,7.637 ; v1(-8.128,8.001) -8.128,6.464 -6.109,4.445 v1(-4.826,4.445) ; -5.19,4.428 v1(-4.826,4.445) ; -5.19,4.462 v1(-4.826,4.445)
  Power w0.152: v1@-17.152,4.013 -16.37,3.937 ; v1@-17.15,4.013 -16.86,3.918 ; v1@-17.143,4.013 -16.587,3.906 ; v1@-17.109,3.774 cw(c-16.716,3.381) -16.716,3.937 ; v1@-17.086,3.615 -16.37,3.937 ; v1@-17.075,3.619 -16.587,3.906 ; v1@-17.014,3.655 -16.86,3.918 ; v1@-17.001,3.666 cw(c-16.348,3.013) -16.348,3.937 ; v1@-4.97,4.301 ccw(c-5.317,3.954) -5.317,4.445 ccw(c-5.317,4.936) v1@-4.97,4.589 ; v1@-4.892,4.253 -5.19,4.462 ; v1@-4.892,4.637 -5.19,4.428 ; v1@-4.874,4.247 -5.19,4.428 ; v1@-4.874,4.643 -5.19,4.462 ; v1(-17.145,3.81) -16.587,3.906 ; v1(-17.145,3.81) -16.86,3.918 ; v1(-17.145,3.81) -16.37,3.937 ; v1(-17.145,3.81) -17.018,3.937 -14.224,3.937 -13.716,4.445 v1(-4.826,4.445) ; -5.19,4.428 v1(-4.826,4.445) ; -5.19,4.462 v1(-4.826,4.445)
  Bottom Layer w0.152: -8.847,10.776 U6.22@-8.847,11.333 ; U6.22@-8.847,11.558 -8.847,9.056 -8.128,8.337 ; v1@-8.222,8.181 ccw(c-8.304,8.337) -8.128,8.337 ; v1@-8.034,8.181 cw(c-7.952,8.337) -8.128,8.337 ; v1@-4.861,4.645 R21.2@-4.217,4.654 ; v1@-4.86,4.645 R21.2@-4.234,4.647 ; v1@-4.834,4.242 R21.2@-4.184,4.318 ; v1@-4.832,4.242 R21.2@-4.216,4.325 ; v1@-4.826,4.648 R21.2@-4.37,4.546 ; v1@-4.814,4.648 -4.544,4.53 ; v1@-4.81,4.648 R21.2@-4.11,4.49 ; v1@-4.794,4.646 -4.531,4.501 ; v1@-4.792,4.645 -4.505,4.494 ; v1@-4.789,4.645 R21.2@-4.394,4.468 ; v1@-4.776,4.642 R21.2@-4.37,4.434 ; v1@-4.768,4.25 R21.2@-4.394,4.468 ; v1@-4.757,4.636 R21.2@-4.173,4.316 ; v1@-4.758,4.636 R21.2@-4.16,4.316 ; v1@-4.756,4.636 R21.2@-4.184,4.318 ; v1@-4.755,4.635 R21.2@-4.216,4.325 ; v1@-4.74,4.261 R21.2@-4.37,4.546 ; v1@-4.734,4.264 -4.505,4.494 ; v1@-4.731,4.266 R21.2@-4.217,4.654 ; v1@-4.73,4.266 R21.2@-4.234,4.647 ; v1@-4.723,4.27 -4.531,4.501 ; v1@-4.704,4.283 -4.544,4.53 ; v1@-4.696,4.601 ccw(c-4.488,4.85) -4.404,4.537 ccw(c-4.302,4.153) v1@-4.648,4.346 ; v1@-4.682,4.301 cw(c-4.227,3.846) R21.2@-4.227,4.49 ; v1@-4.682,4.589 ccw(c-4.443,4.828) -4.443,4.49 ; R21.2@-4.283,4.367 ccw(c-4.58,4.07) -4.58,4.49 ccw(c-4.58,4.909) R21.2@-4.283,4.613 ; R21.2@-4.216,4.325 -4.471,4.504 ; R21.2@-4.216,4.654 -4.471,4.475 ; R21.2@-4.201,4.321 -4.471,4.475 ; R21.2@-4.201,4.659 -4.471,4.504 ; R21.2@-4.192,4.572 R21.2@-4.11,4.49 ; -8.128,8.337 -8.322,8.062 -8.128,8.337 ; -8.128,8.337 -7.934,8.062 -8.128,8.337 ; -8.128,8.337 v1(-8.128,8.001) -8.128,8.337 ; v1(-4.826,4.445) R21.2@-4.11,4.49 ; v1(-4.826,4.445) R21.2@-4.37,4.546 ; v1(-4.826,4.445) R21.2@-4.37,4.434 ; v1(-4.826,4.445) R21.2@-4.394,4.468 ; v1(-4.826,4.445) R21.2@-4.184,4.318 ; v1(-4.826,4.445) R21.2@-4.184,4.662 ; v1(-4.826,4.445) R21.2@-4.16,4.49 ; v1(-4.826,4.445) R21.2@-4.16,4.316 ; v1(-4.826,4.445) R21.2@-4.234,4.647 ; v1(-4.826,4.445) R21.2@-4.16,4.49 ; v1(-4.826,4.445) R21.2@-4.173,4.316 ; v1(-4.826,4.445) R21.2@-4.217,4.654 ; v1(-4.826,4.445) R21.2@-4.16,4.49 ; v1(-4.826,4.445) R21.2@-4.216,4.325 ; v1(-4.826,4.445) R21.2@-4.177,4.663 ; v1(-4.826,4.445) R21.2@-4.16,4.49 ; v1(-4.826,4.445) -4.531,4.501 ; v1(-4.826,4.445) -4.505,4.494 ; v1(-4.826,4.445) -4.544,4.53 ; v1(-4.826,4.445) v1@-4.781,4.49 ; v1@-4.809,4.647 R21.2@-4.16,4.49 ; v1@-4.809,4.647 R21.2@-4.16,4.49 ; v1@-4.809,4.647 R21.2@-4.16,4.49 ; v1@-4.809,4.647 R21.2@-4.16,4.49 ; v1@-4.782,4.247 R21.2@-4.16,4.49 ; v1@-4.782,4.247 R21.2@-4.16,4.49 ; v1@-4.782,4.247 R21.2@-4.16,4.49 ; v1@-4.782,4.247 R21.2@-4.16,4.49 ; v1@-4.781,4.49 R21.2@-4.184,4.318 ; v1@-4.781,4.49 R21.2@-4.184,4.662 ; v1@-4.781,4.49 R21.2@-4.16,4.49 ; v1@-4.781,4.49 R21.2@-4.11,4.49 ; v1@-4.582,4.434 R21.2@-4.173,4.316 ; v1@-4.582,4.434 R21.2@-4.217,4.654 ; v1@-4.582,4.434 R21.2@-4.16,4.49 ; v1@-4.572,4.537 R21.2@-4.216,4.325 ; v1@-4.572,4.537 R21.2@-4.177,4.663 ; v1@-4.572,4.537 R21.2@-4.16,4.49 ; -4.549,4.404 R21.2@-4.16,4.316 ; -4.549,4.404 R21.2@-4.234,4.647 ; -4.549,4.404 R21.2@-4.16,4.49 ; -4.471,4.475 R21.2@-4.16,4.49 ; -4.471,4.504 R21.2@-4.16,4.49 ; R21.2@-4.37,4.434 -4.786,4.246 R21.2@-4.11,4.49 ; R21.2@-4.184,4.662 -4.861,4.645 R21.2@-4.177,4.663 ; R21.2@-4.184,4.662 -4.733,4.264 R21.2@-4.177,4.663 ; R21.2@-4.173,4.316 -4.834,4.242 R21.2@-4.16,4.316
  Bottom Layer w0.203: U3.7@-21.791,1.834 -21.791,1.471 ; U3.7@-21.791,2.109 -21.791,1.471 ; v1@-17.323,3.81 cw(c-17.752,3.81) -17.449,3.506 cw(c-17.145,3.203) v1@-17.145,3.632 ; v1(-17.145,3.81) -19.914,1.041 -21.361,1.041 -21.791,1.471
MB_ADC: C33.1 D11.2 D17.1 R61.2 TP55.1 U6.9 | length 171.1
  Top Layer w0.508: v1(7.874,13.843) 11.804,13.843 TP55.1@12.584,13.063 ; TP55.1@12.338,13.063 ccw(c11.744,13.063) 12.164,13.483 ccw(c12.584,13.903) TP55.1@12.584,13.309
  Bottom Layer w0.152: U6.9@-4.422,13.583 -0.203,13.583 0,13.38 ; U6.9@-4.197,13.583 -3.64,13.583
  Bottom Layer w0.508: D11.2@0.043,11.835 0,13.38 ; D11.2@0.121,12.417 ccw(c-0.559,12.821) 0,13.38 ; D11.2@0.666,11.296 D17.1@3.319,11.328 ; D11.2@0.666,12.776 D17.1@3.319,12.743 ; D11.2@0.814,11.292 D17.1@2.655,11.794 ; D11.2@0.814,12.78 D17.1@2.655,12.277 ; D11.2@0.862,11.296 D17.1@3.433,12.02 ; D11.2@0.862,12.775 D17.1@3.433,12.051 ; D11.2@0.87,11.298 D17.1@3.433,12.051 ; D11.2@0.87,12.774 D17.1@3.433,12.02 ; D11.2@0.937,11.311 2.097,11.974 ; D11.2@0.937,12.761 2.097,12.097 ; D11.2@0.999,11.328 D17.1@2.655,12.277 ; D11.2@0.999,12.743 D17.1@2.655,11.794 ; D11.2@1.003,11.33 2.097,12.097 ; D11.2@1.003,12.742 2.097,11.974 ; D11.2@1.059,11.351 D17.1@3.254,12.709 ; D11.2@1.059,12.72 D17.1@3.254,11.363 ; D11.2@1.06,12.72 D17.1@3.233,11.366 ; D11.2@1.06,12.72 D17.1@3.319,11.328 ; D11.2@1.289,11.508 cw(c2.563,10.235) 2.563,12.036 cw(c2.563,13.837) D11.2@1.289,12.563 ; D11.2@1.303,12.549 0,13.38 ; D11.2@1.369,11.602 cw(c2.019,11.139) 2.225,11.91 ; D11.2@1.369,12.469 ccw(c2.019,12.933) 2.225,12.162 ; D11.2@1.408,11.663 cw(c2.208,11.201) 1.969,12.093 ; D11.2@1.408,12.409 ccw(c2.208,12.87) 1.969,11.978 ; D17.1@3.028,11.508 ccw(c1.755,10.235) 1.755,12.036 ccw(c1.755,13.837) D17.1@3.028,12.563 ; D17.1@3.315,11.33 2.221,12.097 ; D17.1@3.315,12.742 2.221,11.974 ; D17.1@3.381,11.311 2.221,11.974 ; D17.1@3.381,12.761 2.221,12.097 ; D17.1@3.43,11.3 D11.2@1.344,12.036 ; D17.1@3.43,12.771 D11.2@1.344,12.036 ; D17.1@3.504,11.292 D11.2@1.663,11.794 ; D17.1@3.504,12.78 D11.2@1.662,12.277 ; D17.1@3.767,11.32 4.876,12.036 ; D17.1@3.767,12.751 4.876,12.036 ; D17.1@4.195,11.651 cw(c4.876,11.241) 4.876,12.036 ; D17.1@4.195,12.421 ccw(c4.876,12.83) 4.876,12.036 ; 6.517,12.486 v1(7.874,13.843) 6.067,12.036 4.876,12.036 ; 0,13.38 D11.2@0.762,12.036 ; 0,13.38 D11.2@1.344,12.036 ; D11.2@0.762,12.036 D17.1@3.233,12.706 ; D11.2@0.762,12.036 D17.1@3.286,12.036 ; D11.2@0.762,12.036 D17.1@2.655,12.277 ; D11.2@0.762,12.036 D17.1@2.655,11.794 ; D11.2@0.762,12.036 D17.1@3.233,11.366 ; D11.2@0.762,12.036 D17.1@3.319,12.743 ; D11.2@0.762,12.036 D17.1@3.433,12.02 ; D11.2@0.762,12.036 D17.1@3.319,11.328 ; D11.2@0.762,12.036 D17.1@3.433,12.051 ; D11.2@0.762,12.036 D17.1@3.254,11.363 ; D11.2@0.762,12.036 D17.1@3.254,12.709 ; D11.2@0.762,12.036 D17.1@3.286,12.036 ; D11.2@0.762,12.036 2.097,11.974 ; D11.2@0.762,12.036 2.097,12.097 ; D11.2@1.344,12.036 D17.1@3.556,12.036 ; D11.2@1.344,12.036 D17.1@3.556,12.036 ; D11.2@1.663,11.794 D17.1@3.319,12.743 ; D11.2@1.663,11.794 D17.1@3.556,12.036 ; D11.2@1.662,12.277 D17.1@3.319,11.328 ; D11.2@1.662,12.277 D17.1@3.556,12.036 ; 2.221,11.974 D17.1@3.556,12.036 ; 2.221,12.097 D17.1@3.556,12.036 ; D17.1@3.233,11.366 0.674,11.295 D17.1@3.254,11.363 ; D17.1@3.233,12.706 0.674,12.776 D17.1@3.254,12.709 ; D17.1@3.233,12.706 1.06,11.352 D17.1@3.319,12.743 ; D17.1@3.286,12.036 0.872,12.774 D17.1@3.286,12.036 ; D17.1@3.286,12.036 0.872,11.298 D17.1@3.286,12.036 ; D17.1@3.556,12.036 4.876,12.036 ; 4.876,12.036 5.596,11.316 C33.1@5.596,10.459 ; R61.2@5.596,9.316 C33.1@5.596,10.459 ; R61.2@5.596,9.316 C33.1@5.596,10.459 ; R61.2@5.596,9.316 C33.1@5.596,10.459 ; R61.2@5.596,9.316 C33.1@5.596,10.459
MB_LOAD: L6.2 R48.2 R49.1 | length 12.2
  Top Layer w1.27: R49.1@-46.04,21.143 R48.2@-47.625,21.143 ; R49.1@-45.847,21.336 R48.2@-47.625,21.143 ; R48.2@-47.625,21.143 -49.791,21.143 R48.2@-47.625,21.143 ; R48.2@-47.625,21.143 -49.852,21.122 R48.2@-47.625,21.143
MB_VCC: C6.1 C7.1 C8.1 C9.1 C57.1 D4.2 J4.1 L6.1 R8.1 R9.1 TP14.1 | length 46.7
  Top Layer w0.762: L6.1@-53.272,20.663 cw(c-53.272,19.202) -52.239,20.235 ; L6.1@-53.272,21.082 -53.086,21.082 TP14.1@-50.8,18.796 ; L6.1@-52.916,20.912 TP14.1@-50.8,18.796 ; TP14.1@-50.883,18.711 cw(c-52.266,17.302) -50.292,17.302 ; TP14.1@-50.828,18.824 -53.272,21.042 TP14.1@-50.827,18.823 ; TP14.1@-50.816,18.678 cw(c-50.898,18.078) -50.292,18.078 ; R8.1@-50.692,17.391 -50.292,17.391 ; -50.364,17.831 TP14.1@-50.8,18.796 ; TP14.1@-50.8,18.796 -50.292,17.391 ; TP14.1@-50.8,18.796 -50.292,18.288 ; TP14.1@-50.8,18.796 -50.292,18.288 ; -50.292,17.391 R9.1@-49.53,17.391 -50.292,17.391 ; -50.292,17.391 -50.292,18.288
  Top Layer w1.27: C6.1@-55.48,16.567 ccw(c-54.745,16.867) -54.745,16.074 ; C6.1@-55.439,16.506 ccw(c-54.396,17.55) -54.396,16.074 ; C57.1@-55.308,21.919 C8.1@-55.308,21.082 ; -54.778,16.124 C6.1@-55.308,16.637 ; J4.1@-54.03,13.477 -54.03,16.074 ; J4.1@-54.03,14.307 -54.03,16.074 ; C6.1@-55.308,16.637 -54.03,16.074 ; C6.1@-55.308,16.637 -54.745,16.074 ; C6.1@-55.308,16.637 C7.1@-55.308,18.161 ; C6.1@-55.308,16.637 -54.745,16.074 ; C6.1@-55.308,16.637 C7.1@-55.308,18.161 ; C7.1@-55.308,18.161 C9.1@-55.308,19.685 ; C7.1@-55.308,18.161 C9.1@-55.308,19.685 ; C9.1@-55.308,19.685 C8.1@-55.308,21.082 ; C8.1@-55.308,21.082 L6.1@-53.272,21.082 C8.1@-55.308,21.082 ; -54.745,16.074 -54.03,16.074
MCU_2.8V: C36.2 C37.2 C38.2 C43.2 D11.1 D15.1 R40.2 U6.1 U6.12 U6.35 U6.36 | length 105.6
  Top Layer w0.762: v1@0.538,14.957 ccw(c1.038,15.105) 1.038,14.583 ; v1@0.563,14.914 ccw(c1.363,15.714) 1.363,14.583 ; 1.07,14.621 v1(0.635,14.986) ; 3.379,14.583 v1(0.635,14.986) ; D15.1@4.387,12.999 ccw(c2.893,12.999) 3.949,14.055 ccw(c5.006,15.112) D15.1@5.006,13.618 ; D15.1@4.512,12.626 3.422,14.583 ; D15.1@5.006,12.999 3.422,14.583 ; D15.1@5.379,13.493 3.422,14.583 ; v1(0.635,14.986) 1.038,14.583 ; v1(0.635,14.986) 1.038,14.583 ; 1.038,14.583 3.422,14.583
  Power w0.508: -14.704,22.352 -0.644,22.352
  Power w0.762: -14.704,22.352 -15.802,21.254 -15.802,18.841 -14.405,17.444 -12.389,17.444 v1@-11.684,16.739 ; v1@-0.814,10.326 ccw(c-0.527,10.814) -0.127,10.414 ; v1@-0.762,10.312 ccw(c-0.762,11.6) 0.149,10.69 ; -0.644,22.352 0.635,21.073 v1(0.635,14.986) 0.635,11.176 ; -0.118,10.485 v1(-0.762,10.414) ; v1(-0.762,10.414) 0.635,11.176 ; v1(-0.762,10.414) -0.127,10.414 ; v1(-0.762,10.414) -0.127,10.414 ; -0.127,10.414 0.635,11.176
  Bottom Layer w0.203: -11.303,16.764 -11.284,16.783 -11.049,16.783 ; U6.36@-10.697,16.783 -11.049,16.783 ; U6.35@-10.472,16.383 -10.922,16.383 -11.049,16.51 -11.049,16.783 ; U6.36@-10.472,16.783 -11.049,16.783 ; U6.12@-4.422,12.383 -3.637,12.383 ; U6.1@-4.422,16.783 -3.362,16.783 -3.184,16.961 ; -3.568,12.313 ccw(c-3.229,12.652) C43.2@-3.229,12.173 ; C43.2@-3.447,12.193 cw(c-3.615,12.025) C43.2@-3.377,12.025 ; C43.2@-3.341,11.928 -3.637,12.383 ; C43.2@-3.229,11.975 -3.637,12.383 ; C43.2@-3.229,12.025 -3.637,12.383 ; C43.2@-3.147,12.149 -3.637,12.383 ; -2.95,16.961 cw(c-2.95,16.11) C36.2@-2.348,16.712 ; C36.2@-2.46,16.961 cw(c-2.46,16.6) C36.2@-2.204,16.855 ; C36.2@-2.298,16.679 -2.73,16.932 ; C36.2@-2.277,16.672 -3.184,16.961 ; C36.2@-2.243,16.767 -2.438,16.961 -3.184,16.961 ; C36.2@-2.232,16.965 -3.184,16.961 ; C36.2@-2.231,16.965 -2.73,16.932 ; -3.184,16.961 -2.243,16.817 -2.73,16.932
  Bottom Layer w0.762: C38.2@-11.856,17.25 ccw(c-11.303,17.322) -11.303,16.764 ; -11.746,16.983 C38.2@-11.726,17.267 ; C38.2@-11.623,17.347 cw(c-11.97,17.076) v1@-11.659,16.764 ; C38.2@-11.615,17.336 cw(c-12.026,17.081) v1@-11.684,16.739 ; C43.2@-3.229,11.975 -2.228,11.975 0.762,8.985 ; v1(-0.762,10.414) 0.762,8.985 ; -0.475,16.153 ccw(c0.043,16.672) R40.2@0.043,15.939 ; R40.2@0.112,15.87 ccw(c0.845,15.87) 0.327,15.352 ; D11.1@0.433,8.39 ccw(c0.06,8.985) 0.762,8.985 ; D11.1@1.091,8.39 cw(c1.464,8.985) 0.762,8.985 ; v1@-11.776,16.831 C38.2@-11.776,17.267 ; v1@-11.776,16.831 C38.2@-11.776,17.267 ; v1@-11.776,16.831 C38.2@-11.776,17.267 ; v1@-11.776,16.831 v1@-11.684,16.739 ; C38.2@-11.726,17.267 v1@-11.659,16.764 ; C38.2@-11.726,17.267 v1@-11.684,16.739 ; C38.2@-11.726,17.267 v1@-11.684,16.739 ; C38.2@-11.726,17.267 v1@-11.659,16.764 ; C38.2@-11.726,17.267 -11.303,16.764 ; v1@-11.684,16.739 v1@-11.659,16.764 ; v1@-11.659,16.764 -11.303,16.764 ; C37.2@-1.227,16.767 C36.2@-2.243,16.767 C37.2@-1.227,16.767 ; C37.2@-1.227,16.767 C37.2@-1.089,16.767 ; C37.2@-1.089,16.767 R40.2@0.043,15.87 ; C37.2@-1.089,16.767 R40.2@-0.192,15.87 ; R40.2@-0.192,15.87 -1.227,16.717 R40.2@0.043,15.87 ; R40.2@-0.192,15.87 R40.2@0.043,15.87 ; R40.2@-0.192,15.87 0.635,15.043 R40.2@0.043,15.87 ; 0.762,8.985 0.167,8.037 0.762,8.985 ; 0.762,8.985 1.357,8.037 0.762,8.985 ; 0.762,8.985 D11.1@0.762,7.866 0.762,8.985
  other v1: -11.684,16.637
NetC1_1: C1.1 U1.5 | length 3.5
  Top Layer w0.254: U1.5@-65.67,17.282 C1.1@-63.835,17.282 ; -64.864,17.282 -63.85,17.317 -64.124,17.296 ; -64.232,17.282 ccw(c-64.232,17.698) C1.1@-63.937,17.404
NetC10_1: C10.1 C65.1 L1.2 L2.1 R6.2 U2.5 | length 56
  Bottom Layer w0.381: L1.2@-47.298,6.855 -46.54,6.097 ; L1.2@-47.097,7.237 ccw(c-46.793,6.945) L1.2@-47.091,6.647 ; L1.2@-46.895,6.785 -46.54,6.097 ; L1.2@-46.822,6.973 ccw(c-46.511,6.676) -46.815,6.372 ; L1.2@-46.698,6.855 -46.54,6.097 ; L1.2@-46.547,6.71 ccw(c-46.23,6.407) -46.54,6.097 ; L1.2@-46.489,6.869 -46.54,6.097 ; U2.5@-44.971,6.097 -46.54,6.097
  Bottom Layer w0.762: C65.1@-50.461,8.206 ccw(c-51.177,8.922) -50.165,8.922 ccw(c-49.153,8.922) C65.1@-49.869,8.206 ; C65.1@-50.188,8.328 -48.868,8.192 ; -50.165,9.074 cw(c-48.698,9.074) L2.1@-49.735,10.111 ; -50.115,9.453 L2.1@-49.784,10.16 ; C65.1@-50.013,7.52 -48.868,8.192 ; C65.1@-49.869,7.614 cw(c-48.29,6.035) -48.29,8.268 ; C10.1@-47.322,8.367 ccw(c-46.131,9.558) -46.131,7.874 ; -46.774,7.874 -44.238,7.874 -46.752,8.23 ; -46.567,7.931 C10.1@-47.371,8.319 ; R6.2@-44.259,7.874 C10.1@-47.371,8.319 ; R6.2@-44.188,7.874 -46.927,7.874 C10.1@-47.371,8.319 ; C65.1@-50.165,7.86 L2.1@-49.784,10.16 ; C65.1@-50.165,7.86 -49.757,8.268 -47.422,8.268 C10.1@-47.371,8.319 ; C65.1@-50.165,7.86 L2.1@-50.165,9.779 ; C65.1@-50.165,7.91 L2.1@-50.165,9.779 ; C65.1@-50.165,7.91 -48.868,8.192 ; C65.1@-50.165,7.91 L2.1@-49.784,10.16 ; L2.1@-50.165,9.779 -50.581,7.957 L2.1@-49.784,10.16 ; L2.1@-50.165,9.779 -49.749,7.957 L2.1@-49.784,10.16 ; L2.1@-50.165,9.779 L2.1@-49.784,10.16 ; L1.2@-47.371,6.928 C10.1@-47.371,8.319 ; L1.2@-47.371,6.928 L1.2@-47.298,6.855 ; L1.2@-47.371,6.928 C10.1@-47.371,8.319 ; C10.1@-47.371,8.319 L1.2@-47.298,6.855 ; C10.1@-47.371,8.319 L1.2@-47.298,6.855